# Altium PCB Quectel_SC668S_Series_PCB_Footprint_AD_V1.1.PcbDoc
Units mm, origin at the board's own origin, x right, y up, seen from the top; angles counter-clockwise.
Board outline 152.4 x 101.6 mm, 2 copper layers (Top Layer, Bottom Layer); 1 components, 0 nets, 323 pads, 0 vias.
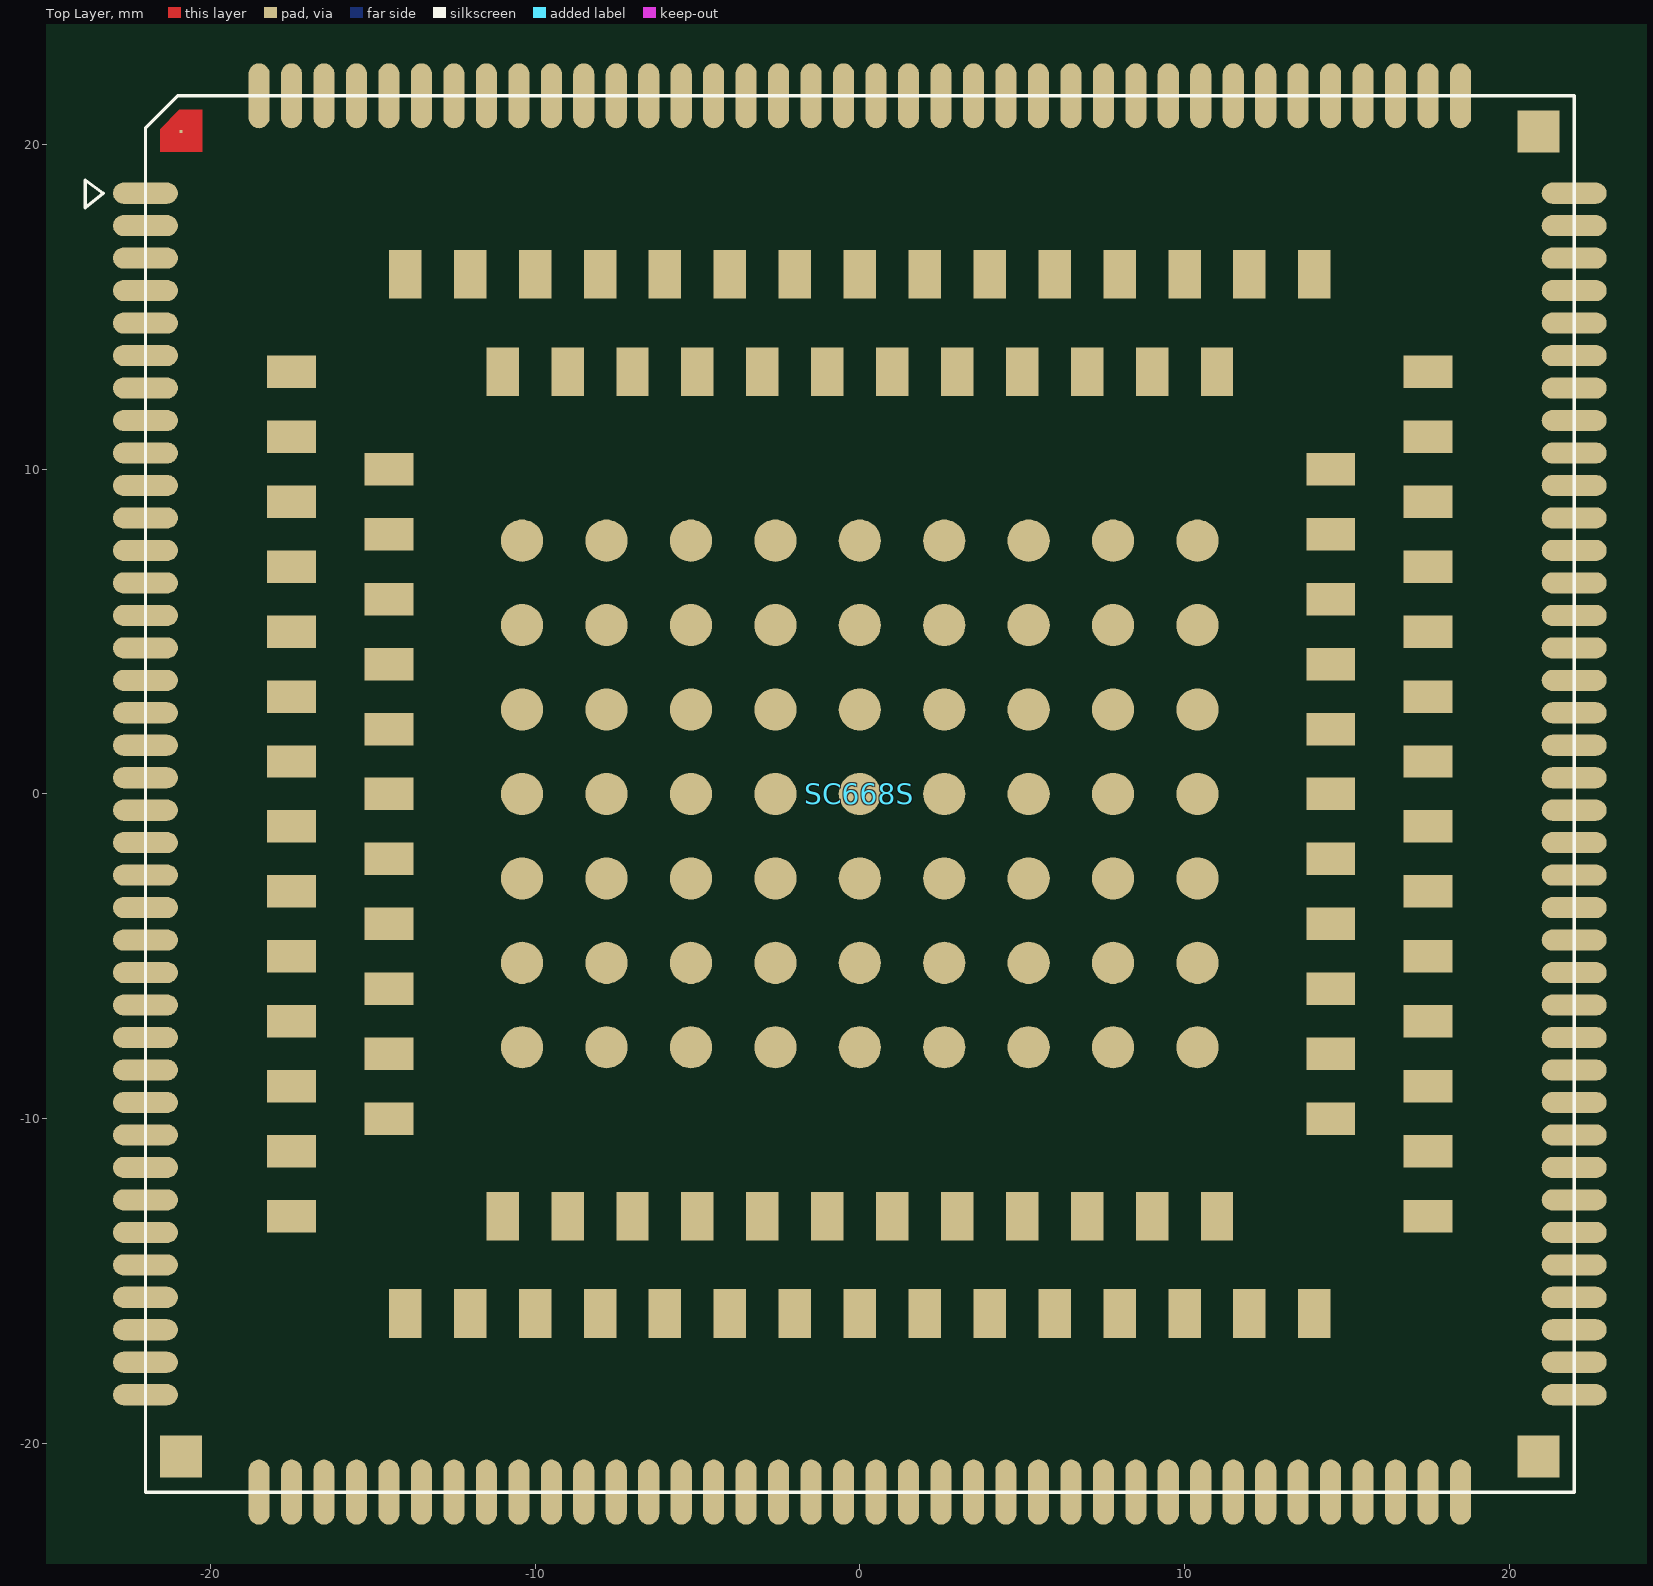
[diagram p0: Top Layer view]
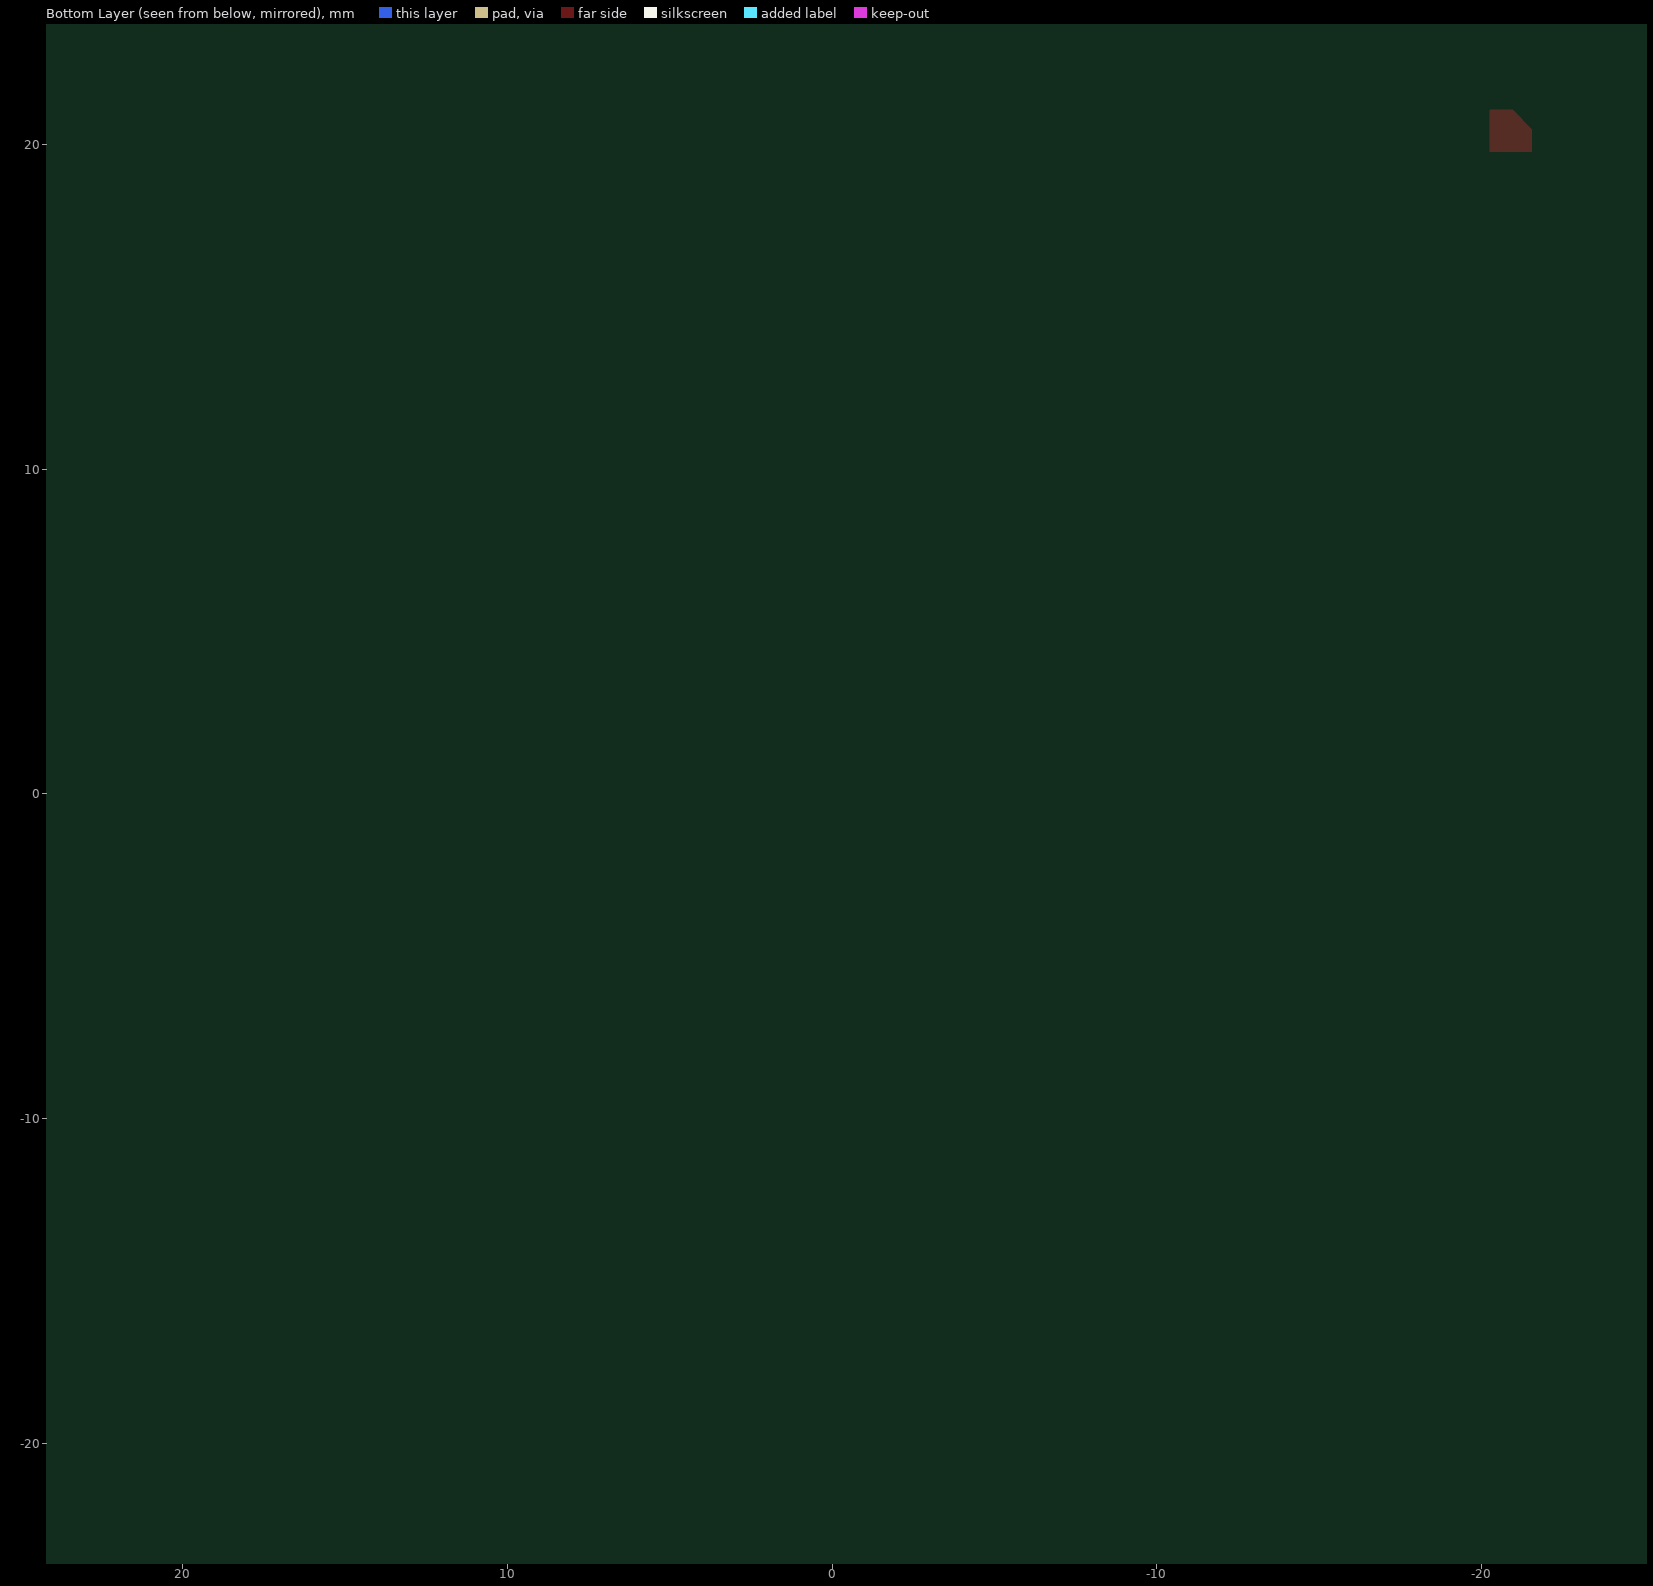
[diagram p1: Bottom Layer view, seen from below]

## Layer stack, top to bottom
Top Solder: solder mask 0.0102, Solder Resist, Dk 3.5
Top Layer: signal copper 0.0356
Dielectric 1: dielectric 0.32, FR-4, Dk 4.8
Bottom Layer: signal copper 0.0356
Bottom Solder: solder mask 0.0102, Solder Resist, Dk 3.5

## Board outline
-71.882,-56.261 80.518,-56.261 80.518,45.339 -71.882,45.339

## Design rules (kind name [scope] priority, off if disabled: settings)
Clearance [All] p1: gap=0.254
PolygonConnect [All] p1: connectstyle=Relief reliefconductorwidth=0.254 reliefentries=4 polygonreliefangle="90 Angle" airgapwidth=0.254
RoutingVias [All] p1: holewidth=0.711 width=1.27 viastyle="Through Hole" minholewidth=0.711 minwidth=1.27 maxholewidth=0.711 maxwidth=1.27
SolderMaskExpansion [All] p1: expansion=0.102
Width [All] p1: maxlimit=0.254 minlimit=0.254 preferedwidth=0.254
30 further rules are at their usual default settings.

## Components (designator, comment, footprint, x,y, rotation, side; value= is the part's Value field where it differs from the comment)
SC668S "Comment" SC668S 0,0 r0 top

## Footprints (in the part's own frame and the unit in brackets; to place one, negate y for a bottom-side part, rotate by r counter-clockwise, add the part's x,y. Pads: shape width x height; smd on the part's side, far side on the other; paste and mask are expansions set on the pad)
SC668S [mm] "SC668S Module  323PIN 43x44mm H2.85mm RO"
  oval 2x0.65 smd mask+0.05: 1(-22,18.5) 2(-22,17.5) 3(-22,16.5) 4(-22,15.5) 5(-22,14.5) 6(-22,13.5) 7(-22,12.5) 8(-22,11.5) 9(-22,10.5) 10(-22,9.5) 11(-22,8.5) 12(-22,7.5) 13(-22,6.5) 14(-22,5.5) 15(-22,4.5) 16(-22,3.5) 17(-22,2.5) 18(-22,1.5) 19(-22,0.5) 20(-22,-0.5) 21(-22,-1.5) 22(-22,-2.5) 23(-22,-3.5) 24(-22,-4.5) 25(-22,-5.5) 26(-22,-6.5) 27(-22,-7.5) 28(-22,-8.5) 29(-22,-9.5) 30(-22,-10.5) 31(-22,-11.5) 32(-22,-12.5) 33(-22,-13.5) 34(-22,-14.5) 35(-22,-15.5) 36(-22,-16.5) 37(-22,-17.5) 38(-22,-18.5) 77(22,-18.5) 78(22,-17.5) 79(22,-16.5) 80(22,-15.5) 81(22,-14.5) 82(22,-13.5) 83(22,-12.5) 84(22,-11.5) 85(22,-10.5) 86(22,-9.5) 87(22,-8.5) 88(22,-7.5) 89(22,-6.5) 90(22,-5.5) 91(22,-4.5) 92(22,-3.5) 93(22,-2.5) 94(22,-1.5) 95(22,-0.5) 96(22,0.5) 97(22,1.5) 98(22,2.5) 99(22,3.5) 100(22,4.5) 101(22,5.5) 102(22,6.5) 103(22,7.5) 104(22,8.5) 105(22,9.5) 106(22,10.5) 107(22,11.5) 108(22,12.5) 109(22,13.5) 110(22,14.5) 111(22,15.5) 112(22,16.5) 113(22,17.5) 114(22,18.5)
  oval 0.65x2 smd mask+0.05: 39(-18.5,-21.5) 40(-17.5,-21.5) 41(-16.5,-21.5) 42(-15.5,-21.5) 43(-14.5,-21.5) 44(-13.5,-21.5) 45(-12.5,-21.5) 46(-11.5,-21.5) 47(-10.5,-21.5) 48(-9.5,-21.5) 49(-8.5,-21.5) 50(-7.5,-21.5) 51(-6.5,-21.5) 52(-5.5,-21.5) 53(-4.5,-21.5) 54(-3.5,-21.5) 55(-2.5,-21.5) 56(-1.5,-21.5) 57(-0.5,-21.5) 58(0.5,-21.5) 59(1.5,-21.5) 60(2.5,-21.5) 61(3.5,-21.5) 62(4.5,-21.5) 63(5.5,-21.5) 64(6.5,-21.5) 65(7.5,-21.5) 66(8.5,-21.5) 67(9.5,-21.5) 68(10.5,-21.5) 69(11.5,-21.5) 70(12.5,-21.5) 71(13.5,-21.5) 72(14.5,-21.5) 73(15.5,-21.5) 74(16.5,-21.5) 75(17.5,-21.5) 76(18.5,-21.5) 115(18.5,21.5) 116(17.5,21.5) 117(16.5,21.5) 118(15.5,21.5) 119(14.5,21.5) 120(13.5,21.5) 121(12.5,21.5) 122(11.5,21.5) 123(10.5,21.5) 124(9.5,21.5) 125(8.5,21.5) 126(7.5,21.5) 127(6.5,21.5) 128(5.5,21.5) 129(4.5,21.5) 130(3.5,21.5) 131(2.5,21.5) 132(1.5,21.5) 133(0.5,21.5) 134(-0.5,21.5) 135(-1.5,21.5) 136(-2.5,21.5) 137(-3.5,21.5) 138(-4.5,21.5) 139(-5.5,21.5) 140(-6.5,21.5) 141(-7.5,21.5) 142(-8.5,21.5) 143(-9.5,21.5) 144(-10.5,21.5) 145(-11.5,21.5) 146(-12.5,21.5) 147(-13.5,21.5) 148(-14.5,21.5) 149(-15.5,21.5) 150(-16.5,21.5) 151(-17.5,21.5) 152(-18.5,21.5)
  rect 1.5x1 smd mask+0.05: 153(-17.5,13) 154(-17.5,11) 155(-17.5,9) 156(-17.5,7) 157(-17.5,5) 158(-17.5,3) 159(-17.5,1) 160(-17.5,-1) 161(-17.5,-3) 162(-17.5,-5) 163(-17.5,-7) 164(-17.5,-9) 165(-17.5,-11) 166(-17.5,-13) 182(17.5,-13) 183(17.5,-11) 184(17.5,-9) 185(17.5,-7) 186(17.5,-5) 187(17.5,-3) 188(17.5,-1) 189(17.5,1) 190(17.5,3) 191(17.5,5) 192(17.5,7) 193(17.5,9) 194(17.5,11) 195(17.5,13) 211(-14.5,10) 212(-14.5,8) 213(-14.5,6) 214(-14.5,4) 215(-14.5,2) 216(-14.5,0) 217(-14.5,-2) 218(-14.5,-4) 219(-14.5,-6) 220(-14.5,-8) 221(-14.5,-10) 234(14.5,-10) 235(14.5,-8) 236(14.5,-6) 237(14.5,-4) 238(14.5,-2) 239(14.5,0) 240(14.5,2) 241(14.5,4) 242(14.5,6) 243(14.5,8) 244(14.5,10)
  rect 1x1.5 smd mask+0.05: 167(-14,-16) 168(-12,-16) 169(-10,-16) 170(-8,-16) 171(-6,-16) 172(-4,-16) 173(-2,-16) 174(0,-16) 175(2,-16) 176(4,-16) 177(6,-16) 178(8,-16) 179(10,-16) 180(12,-16) 181(14,-16) 196(14,16) 197(12,16) 198(10,16) 199(8,16) 200(6,16) 201(4,16) 202(2,16) 203(0,16) 204(-2,16) 205(-4,16) 206(-6,16) 207(-8,16) 208(-10,16) 209(-12,16) 210(-14,16) 222(-11,-13) 223(-9,-13) 224(-7,-13) 225(-5,-13) 226(-3,-13) 227(-1,-13) 228(1,-13) 229(3,-13) 230(5,-13) 231(7,-13) 232(9,-13) 233(11,-13) 245(11,13) 246(9,13) 247(7,13) 248(5,13) 249(3,13) 250(1,13) 251(-1,13) 252(-3,13) 253(-5,13) 254(-7,13) 255(-9,13) 256(-11,13)
  round 1.3 smd mask+0.05: 257(-10.4,7.8) 258(-10.4,5.2) 259(-10.4,2.6) 260(-10.4,0) 261(-10.4,-2.6) 262(-10.4,-5.2) 263(-10.4,-7.8) 264(-7.8,7.8) 265(-7.8,5.2) 266(-7.8,2.6) 267(-7.8,0) 268(-7.8,-2.6) 269(-7.8,-5.2) 270(-7.8,-7.8) 271(-5.2,7.8) 272(-5.2,5.2) 273(-5.2,2.6) 274(-5.2,0) 275(-5.2,-2.6) 276(-5.2,-5.2) 277(-5.2,-7.8) 278(-2.6,7.8) 279(-2.6,5.2) 280(-2.6,2.6) 281(-2.6,0) 282(-2.6,-2.6) 283(-2.6,-5.2) 284(-2.6,-7.8) 285(0,7.8) 286(0,5.2) 287(0,2.6) 288(0,0) 289(0,-2.6) 290(0,-5.2) 291(0,-7.8) 292(2.6,7.8) 293(2.6,5.2) 294(2.6,2.6) 295(2.6,0) 296(2.6,-2.6) 297(2.6,-5.2) 298(2.6,-7.8) 299(5.2,7.8) 300(5.2,5.2) 301(5.2,2.6) 302(5.2,0) 303(5.2,-2.6) 304(5.2,-5.2) 305(5.2,-7.8) 306(7.8,7.8) 307(7.8,5.2) 308(7.8,2.6) 309(7.8,0) 310(7.8,-2.6) 311(7.8,-5.2) 312(7.8,-7.8) 313(10.4,7.8) 314(10.4,5.2) 315(10.4,2.6) 316(10.4,0) 317(10.4,-2.6) 318(10.4,-5.2) 319(10.4,-7.8)
  rect 0.1x0.1 smd: 320(-20.9,20.4)
  rect 1.3x1.3 smd mask+0.05: 321(-20.9,-20.4) 322(20.9,-20.4) 323(20.9,20.4)
  Top Layer region: -21.55,19.775 -20.25,19.775 -20.25,21.075 -20.95,21.075 -21.55,20.475 -21.55,19.775
  silkscreen extent -23.85,-21.5 22,21.5

## Nets (pads, with @x,y where several pads share a name; then routed paths per layer and width w, separated by ;. In a path a pad name is that pad's centre, name@x,y a point inside that pad or via, vN(x,y) a via of type N, cw(c..) or ccw(c..) an arc to the next point about the centre after c; other vN are vias at no path point)
pads on no net: SC668S.1 SC668S.2 SC668S.3 SC668S.4 SC668S.5 SC668S.6 SC668S.7 SC668S.8 SC668S.9 SC668S.10 SC668S.11 SC668S.12 SC668S.13 SC668S.14 SC668S.15 SC668S.16 SC668S.17 SC668S.18 SC668S.19 SC668S.20 SC668S.21 SC668S.22 SC668S.23 SC668S.24 SC668S.25 SC668S.26 SC668S.27 SC668S.28 SC668S.29 SC668S.30 SC668S.31 SC668S.32 SC668S.33 SC668S.34 SC668S.35 SC668S.36 SC668S.37 SC668S.38 SC668S.39 SC668S.40 SC668S.41 SC668S.42 SC668S.43 SC668S.44 SC668S.45 SC668S.46 SC668S.47 SC668S.48 SC668S.49 SC668S.50 SC668S.51 SC668S.52 SC668S.53 SC668S.54 SC668S.55 SC668S.56 SC668S.57 SC668S.58 SC668S.59 SC668S.60 SC668S.61 SC668S.62 SC668S.63 SC668S.64 SC668S.65 SC668S.66 SC668S.67 SC668S.68 SC668S.69 SC668S.70 SC668S.71 SC668S.72 SC668S.73 SC668S.74 SC668S.75 SC668S.76 SC668S.77 SC668S.78 SC668S.79 SC668S.80 SC668S.81 SC668S.82 SC668S.83 SC668S.84 SC668S.85 SC668S.86 SC668S.87 SC668S.88 SC668S.89 SC668S.90 SC668S.91 SC668S.92 SC668S.93 SC668S.94 SC668S.95 SC668S.96 SC668S.97 SC668S.98 SC668S.99 SC668S.100 SC668S.101 SC668S.102 SC668S.103 SC668S.104 SC668S.105 SC668S.106 SC668S.107 SC668S.108 SC668S.109 SC668S.110 SC668S.111 SC668S.112 SC668S.113 SC668S.114 SC668S.115 SC668S.116 SC668S.117 SC668S.118 SC668S.119 SC668S.120 SC668S.121 SC668S.122 SC668S.123 SC668S.124 SC668S.125 SC668S.126 SC668S.127 SC668S.128 SC668S.129 SC668S.130 SC668S.131 SC668S.132 SC668S.133 SC668S.134 SC668S.135 SC668S.136 SC668S.137 SC668S.138 SC668S.139 SC668S.140 SC668S.141 SC668S.142 SC668S.143 SC668S.144 SC668S.145 SC668S.146 SC668S.147 SC668S.148 SC668S.149 SC668S.150 SC668S.151 SC668S.152 SC668S.153 SC668S.154 SC668S.155 SC668S.156 SC668S.157 SC668S.158 SC668S.159 SC668S.160 SC668S.161 SC668S.162 SC668S.163 SC668S.164 SC668S.165 SC668S.166 SC668S.167 SC668S.168 SC668S.169 SC668S.170 SC668S.171 SC668S.172 SC668S.173 SC668S.174 SC668S.175 SC668S.176 SC668S.177 SC668S.178 SC668S.179 SC668S.180 SC668S.181 SC668S.182 SC668S.183 SC668S.184 SC668S.185 SC668S.186 SC668S.187 SC668S.188 SC668S.189 SC668S.190 SC668S.191 SC668S.192 SC668S.193 SC668S.194 SC668S.195 SC668S.196 SC668S.197 SC668S.198 SC668S.199 SC668S.200 SC668S.201 SC668S.202 SC668S.203 SC668S.204 SC668S.205 SC668S.206 SC668S.207 SC668S.208 SC668S.209 SC668S.210 SC668S.211 SC668S.212 SC668S.213 SC668S.214 SC668S.215 SC668S.216 SC668S.217 SC668S.218 SC668S.219 SC668S.220 SC668S.221 SC668S.222 SC668S.223 SC668S.224 SC668S.225 SC668S.226 SC668S.227 SC668S.228 SC668S.229 SC668S.230 SC668S.231 SC668S.232 SC668S.233 SC668S.234 SC668S.235 SC668S.236 SC668S.237 SC668S.238 SC668S.239 SC668S.240 SC668S.241 SC668S.242 SC668S.243 SC668S.244 SC668S.245 SC668S.246 SC668S.247 SC668S.248 SC668S.249 SC668S.250 SC668S.251 SC668S.252 SC668S.253 SC668S.254 SC668S.255 SC668S.256 SC668S.257 SC668S.258 SC668S.259 SC668S.260 SC668S.261 SC668S.262 SC668S.263 SC668S.264 SC668S.265 SC668S.266 SC668S.267 SC668S.268 SC668S.269 SC668S.270 SC668S.271 SC668S.272 SC668S.273 SC668S.274 SC668S.275 SC668S.276 SC668S.277 SC668S.278 SC668S.279 SC668S.280 SC668S.281 SC668S.282 SC668S.283 SC668S.284 SC668S.285 SC668S.286 SC668S.287 SC668S.288 SC668S.289 SC668S.290 SC668S.291 SC668S.292 SC668S.293 SC668S.294 SC668S.295 SC668S.296 SC668S.297 SC668S.298 SC668S.299 SC668S.300 SC668S.301 SC668S.302 SC668S.303 SC668S.304 SC668S.305 SC668S.306 SC668S.307 SC668S.308 SC668S.309 SC668S.310 SC668S.311 SC668S.312 SC668S.313 SC668S.314 SC668S.315 SC668S.316 SC668S.317 SC668S.318 SC668S.319 SC668S.320 SC668S.321 SC668S.322 SC668S.323